# Altium PCB Touch_MediumWheel_Flex.PcbDoc
Units mil, origin at the board's own origin, x right, y up, seen from the top; angles counter-clockwise.
Board outline 2779.32 x 1873.81 mil, 2 copper layers (Top Layer, Bottom Layer), stack 5.76 mil thick; 4 components, 10 nets, 6 pads, 0 vias.
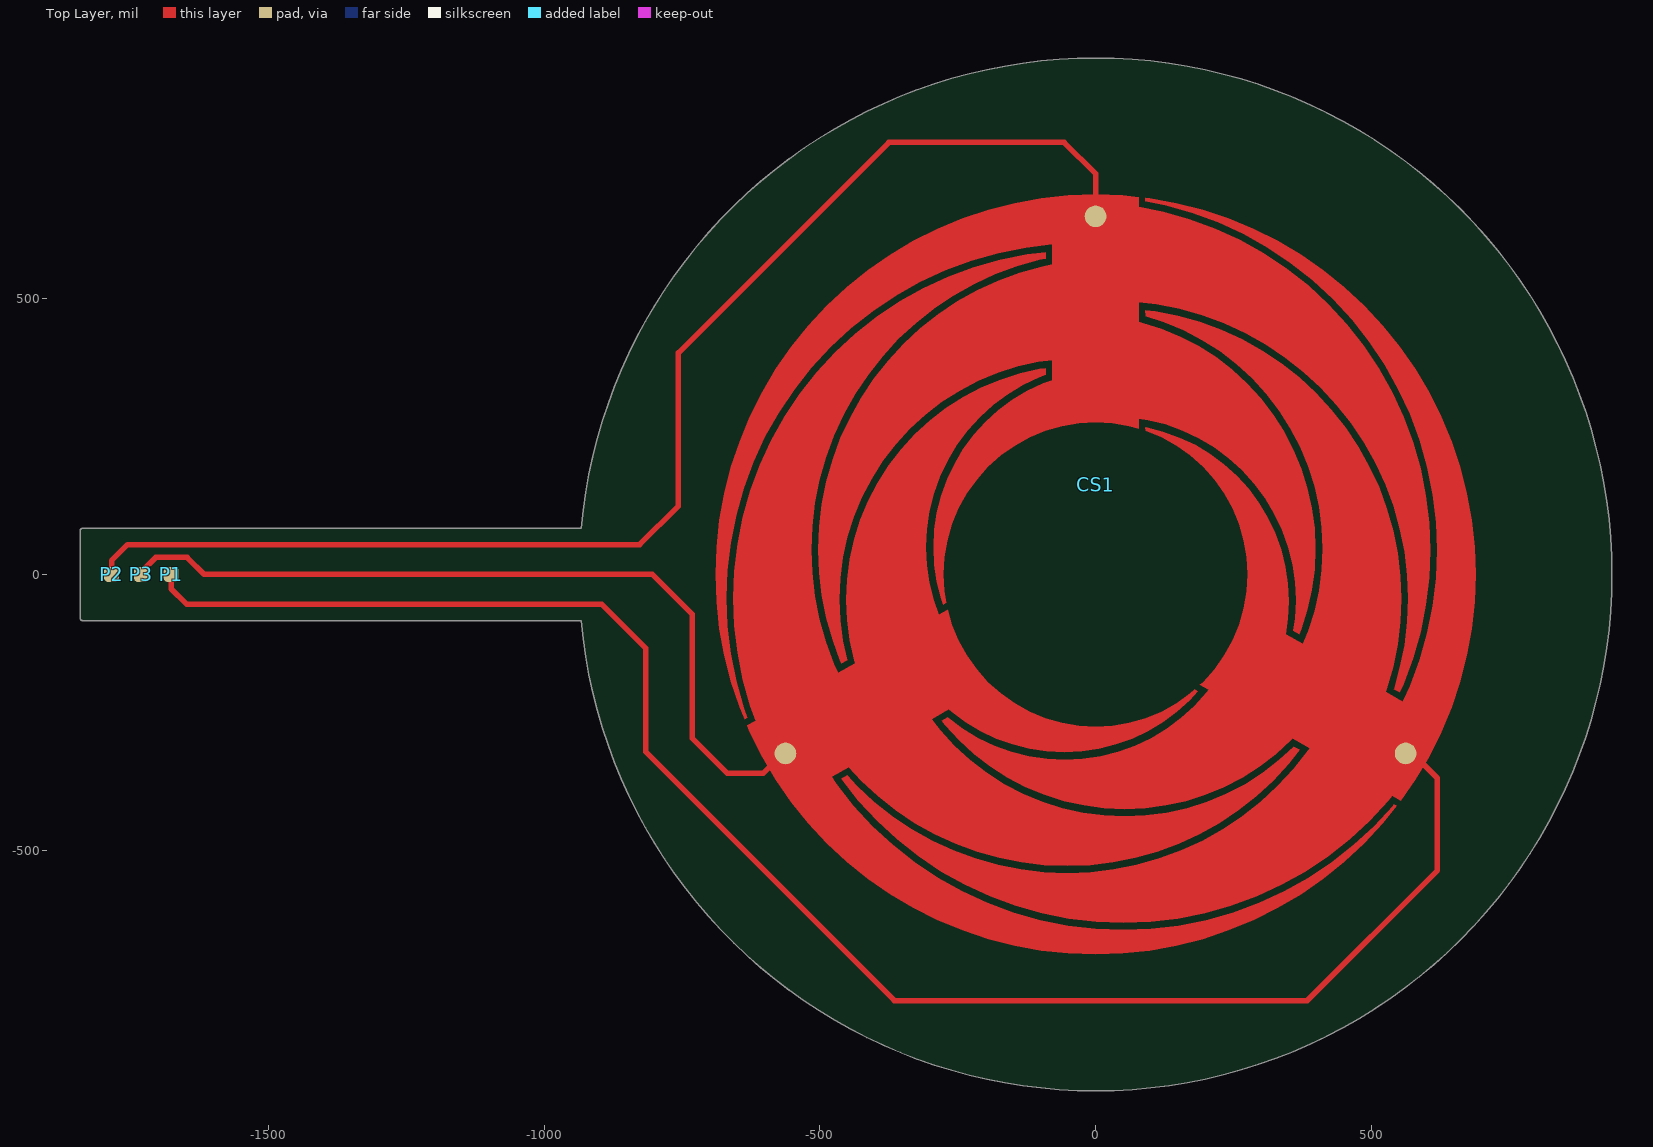
[diagram p0: Top Layer view]
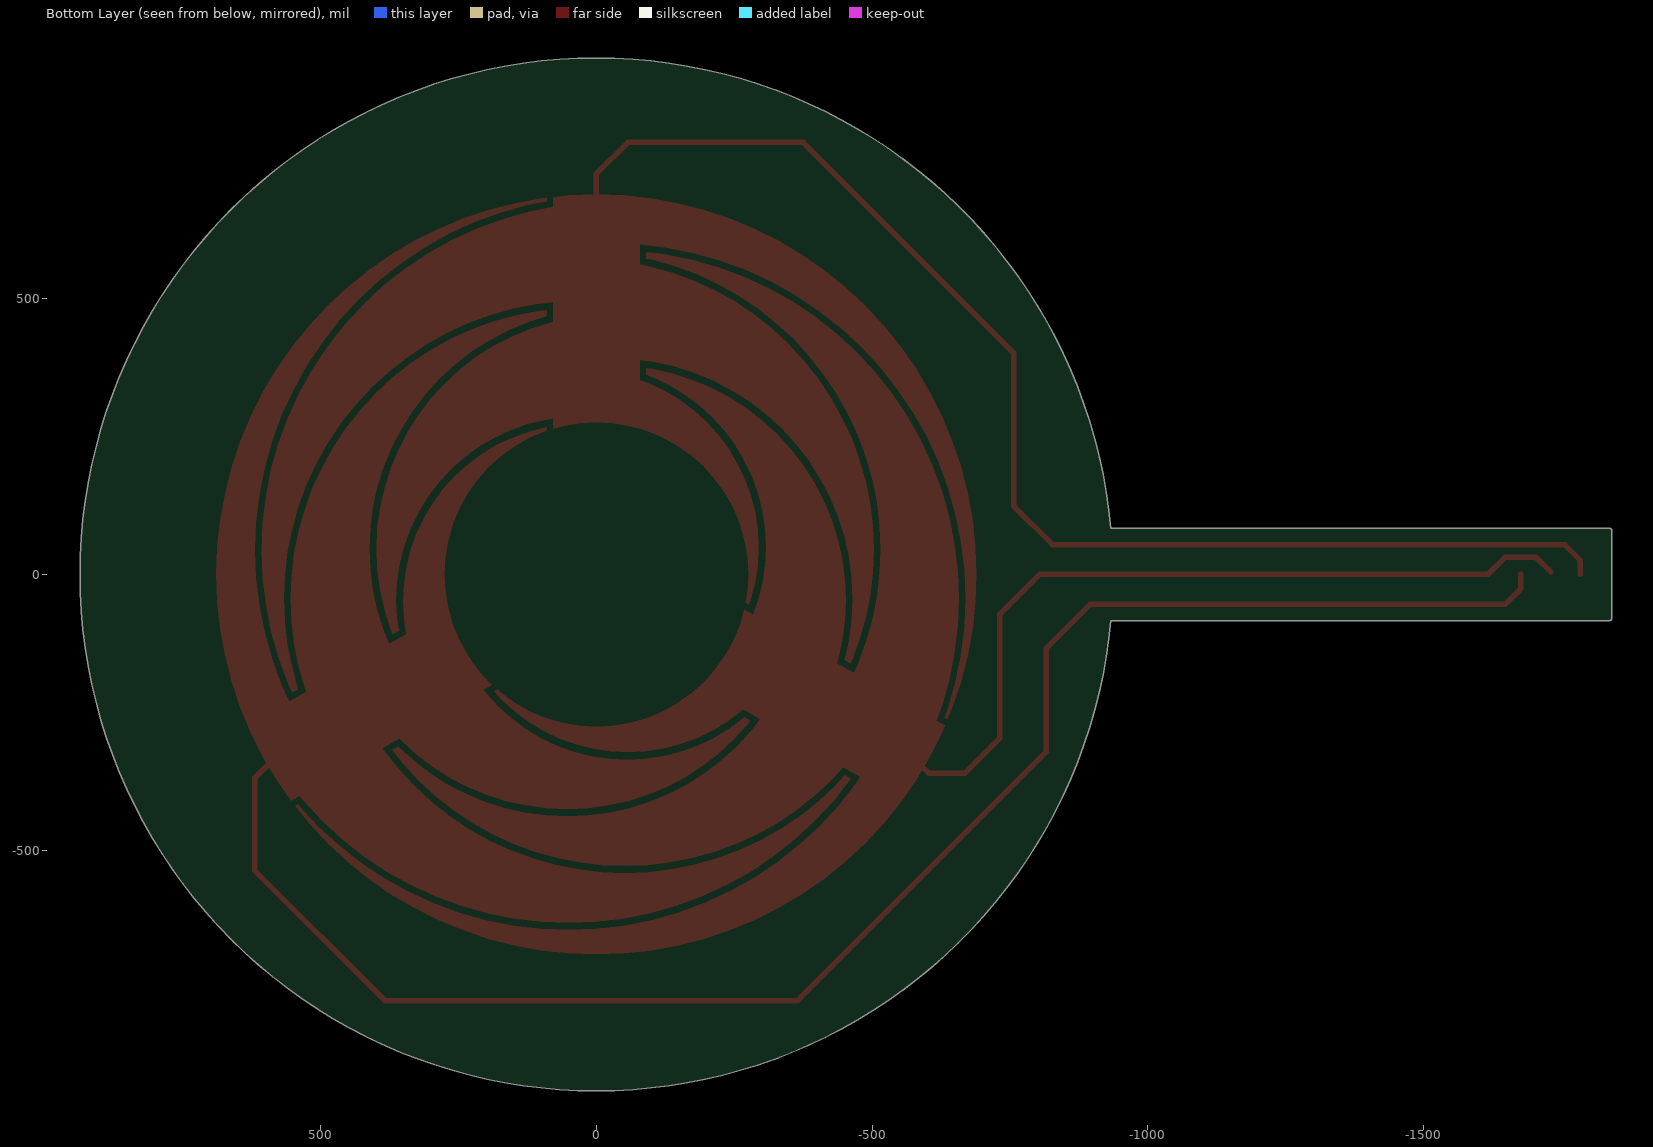
[diagram p1: Bottom Layer view, seen from below]

## Layer stack, top to bottom
Top Layer: signal copper 1.38
Polyimide: core 3, Polyimide, Dk 0
Bottom Layer: signal copper 1.38

## Board outline
-1842.42,-78.74 -1842.42,78.74 cw(c-1837.4,78.74) -1837.4,83.76 -933.15,83.76 cw(c0,0) 0,936.9 cw(c0,0) 936.9,0 cw(c0,0) 0,-936.9 cw(c0,0) -933.15,-83.76 -1837.4,-83.76 cw(c-1837.4,-78.74)

## Design rules (kind name [scope] priority, off if disabled: settings)
AcuteAngle [All] p1: minimum=6.00000000000000E+0001 checktracksonly=FALSE
BoardOutlineClearance [All] p1: gap=15
Clearance Clearance_CAPIN1 [InNamedPolygon('NONET_L01_P002') vs InNet('CAPIN1')] p1: gap=98.43
Clearance Clearance_CAPIN2 [InNamedPolygon('NONET_L01_P002') vs InNet('CAPIN2')] p2: gap=98.43
Clearance [All] p3: gap=6
FanoutControl Fanout_LCC [IsLCC] p1: bgadir=Out bgaviamode=Centered fanoutstyle=Auto fanoutdirection=Alternating viagrid=1 // Fanout_LCC (Default Rule)
FanoutControl Fanout_BGA [IsBGA] p2: bgadir=Out bgaviamode=Centered fanoutstyle=Auto fanoutdirection=Alternating viagrid=1 // Fanout_BGA (Default Rule)
FanoutControl Fanout_Default [All] p4: bgadir=Out bgaviamode=Centered fanoutstyle=Auto fanoutdirection=Alternating viagrid=1 // Fanout_Default (Default Rule)
FanoutControl Fanout_Small [(CompPinCount < 5)] p5: bgadir=Out bgaviamode=Centered fanoutstyle=Auto fanoutdirection=OutThenIn viagrid=1 // Fanout_Small (Default Rule)
Height Height_TOP [OnLayer('Top Layer')] p2: minheight=0 maxheight=118.11 prefheight=39.37
Height Height_BOT [OnLayer('Bottom Layer')] p3: minheight=0 maxheight=787.4 prefheight=118.11
HoleSize [All] p1: absolutevalues=TRUE maxlimit=100 minlimit=13 maxpercent=80.000 minpercent=20.000
HoleToHoleClearance [All] p1: gap=6 allowstackedmicrovias=TRUE
MinimumAnnularRing [All] p1: minimumring=7
MinimumSolderMaskSliver [All] p1: minsoldermaskwidth=4
PolygonConnect [All] p1: connectstyle=Relief reliefconductorwidth=10 reliefentries=4 polygonreliefangle="90 Angle" airgapwidth=10
RoutingVias [All] p1: holewidth=13 width=27 viastyle="Through Hole" minholewidth=13 minwidth=27 maxholewidth=28 maxwidth=50
SilkToBoardRegionClearance SilkToBoardRegionClearance_1 [All] p2:
SolderMaskExpansion [All] p1: expansion=4
Width Width_VBAT [InNet('VBAT')] p1: maxlimit=50 minlimit=8 preferedwidth=12
Width Width_BATSENSE [InNet('BAT_SENSE')] p2: maxlimit=50 minlimit=8 preferedwidth=12
Width Width_VCC [InNet('VCC')] p3: maxlimit=50 minlimit=8 preferedwidth=12
Width Width_GND [InNet('GND')] p4: maxlimit=20 minlimit=8 preferedwidth=12
Width [All] p5: maxlimit=10 minlimit=6 preferedwidth=8
23 further rules are at their usual default settings.

## Components (designator, comment, footprint, x,y, rotation, side; value= is the part's Value field where it differs from the comment)
CS1 "Medium QTouch Wheel" ? 0,0 r0 top locked
P1 "PAD_27x27MILS" PAD_27x27MILS -1677,0 r0 top
P2 "PAD_27x27MILS" PAD_27x27MILS -1785,0 r0 top
P3 "PAD_27x27MILS" PAD_27x27MILS -1731,0 r0 top

## Footprints (in the part's own frame and the unit in brackets; to place one, negate y for a bottom-side part, rotate by r counter-clockwise, add the part's x,y. Pads: shape width x height; smd on the part's side, far side on the other; paste and mask are expansions set on the pad)
PAD_27x27MILS [mil] "Pad 27 x 27 mils"
  rrect50% 27x27 smd: 1(0,0)
? [mm]
  round 1 smd paste-0.5: 1(14.289,-8.25) 2(0,16.5) 3(-14.289,-8.25)
  Top Layer region: 243 vertices and 0 holes, not listed, extent -16.697,-17.511 13.878,14.85
  Top Layer region: 242 vertices and 0 holes, not listed, extent -17.511,-6.682 15.417,17.511
  Top Layer region: 246 vertices and 0 holes, not listed, extent -11.718,-16.058 17.511,17.353

## Part data
CS1: library part MediumQTouchWheel
P1 P2 P3: "27 x 27 mils PAD connection"

## Nets (pads, with @x,y where several pads share a name; then routed paths per layer and width w, separated by ;. In a path a pad name is that pad's centre, name@x,y a point inside that pad or via, vN(x,y) a via of type N, cw(c..) or ccw(c..) an arc to the next point about the centre after c; other vN are vias at no path point)
CAPIN: 
CAPIN1: 
CAPIN2: 
CAPIN3: 
CAPIN4: 
CAPIN5: 
CAPIN6: 
NetCS1_1: CS1.1 P1.1 | length 3075.4
  Top Layer w10: P1.1 -1677,-26 -1649,-54 -896,-54 -816,-134 -816,-322 -365,-773 384,-773 620,-537 620,-369.77 578.23,-328 CS1.1@572,-334.23
NetCS1_2: CS1.2 P2.1 | length 2388.2
  Top Layer w10: P2.1 -1785,25 -1756,54 -827,54 -757,124 -757,402 -375,784 -57,784 0,727 CS1.2
NetCS1_3: CS1.3 P3.1 | length 1487.1
  Top Layer w10: P3.1@-1731,5 -1705,31 -1648,31 -1617,0 -804,0 -732,-72 -732,-297 -668,-361 -603,-361 CS1.3@-564.69,-322.69

## Silkscreen, mask and mechanical layers (free items; w line width, h text height)
Outline:
  circle w10: c0,0 r262.6
  pour cut-out: 0,-262.6 cw(c0,0) -262.6,0 cw(c0,0) 0,262.6 cw(c0,0) 262.6,0 cw(c0,0)
  lines w10: -928.56,-78.74 -1837.4,-78.74 -1837.4,78.74 -928.55,78.74 ; -928.56,-78.7 ccw(c0,0) -928.55,78.79

## Dimensions
-928.55,78.74 to -1837.4,78.74 on Dimensions Top
0,0 to 1105,-675 on Dimensions Top
-262.6,0 to 262.6,0 on Dimensions Top